# Altium PCB Nguon_MIC_PCB.PcbDoc
Units mil, origin at the board's own origin, x right, y up, seen from the top; angles counter-clockwise.
Board outline 3937.01 x 2362.2 mil, 2 copper layers (Top Layer, Bottom Layer); 26 components, 17 nets, 81 pads, 3 vias.
Unrouted connection lines stored in the file: 1.
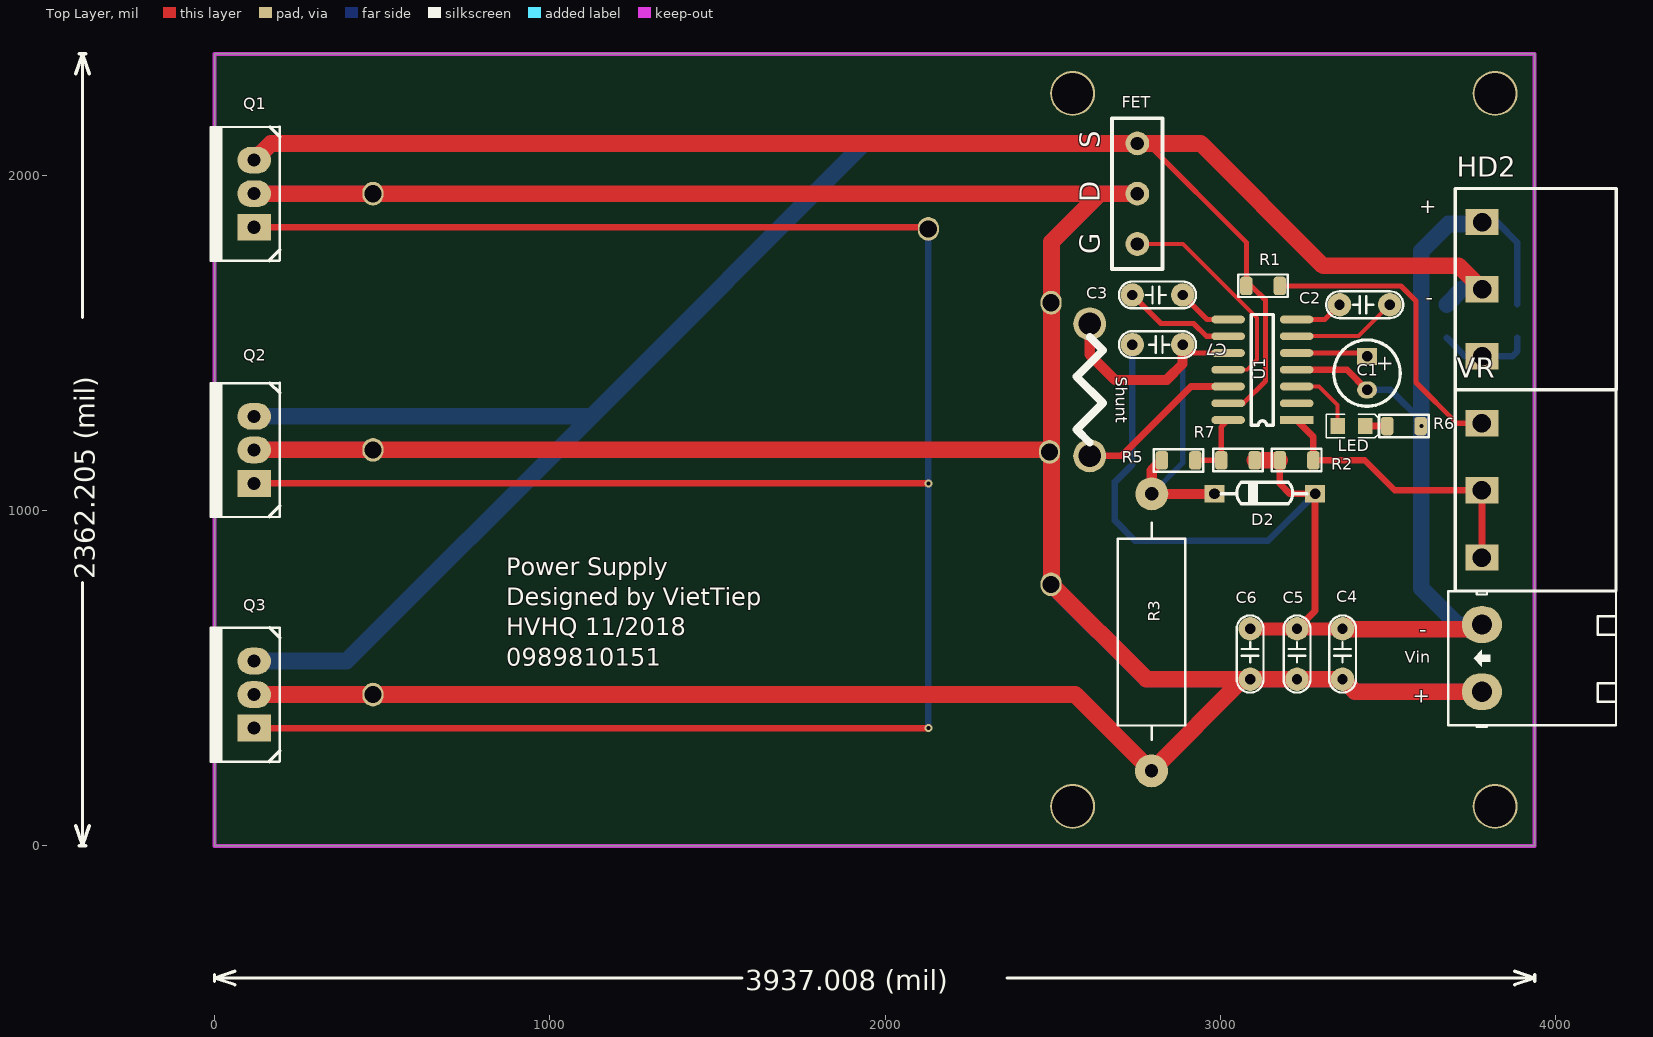
[diagram p0: Top Layer view]
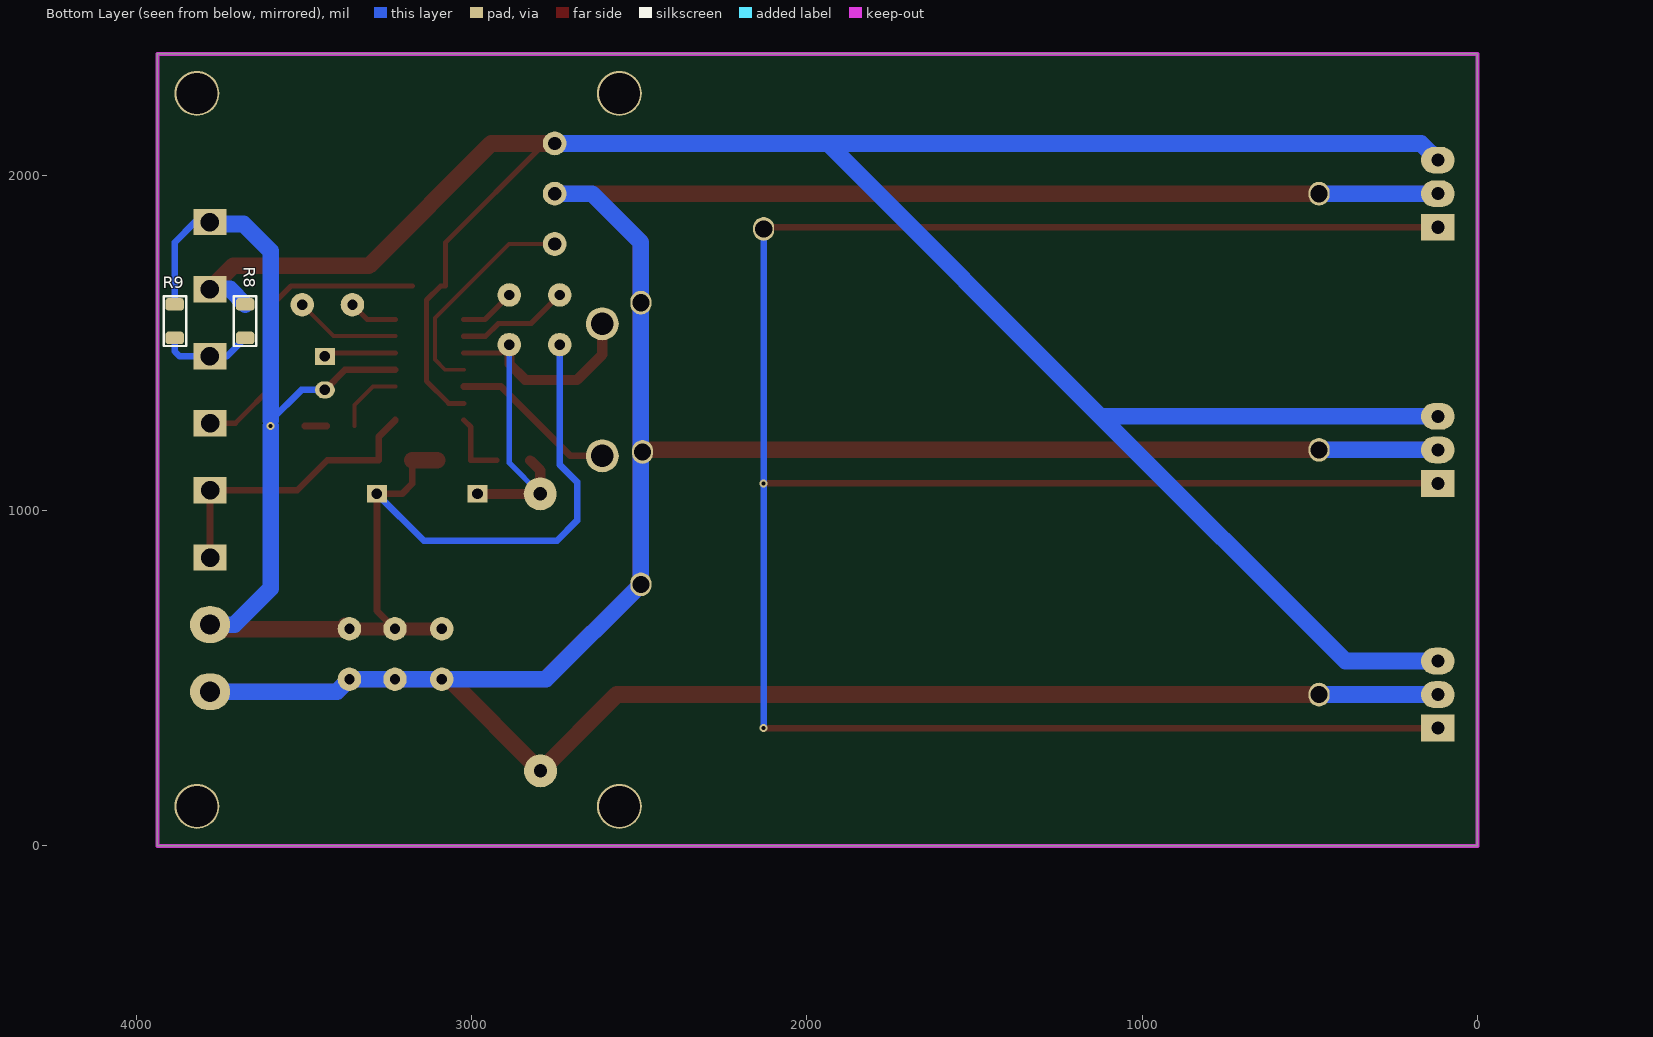
[diagram p1: Bottom Layer view, seen from below]

## Layer stack, top to bottom
Top Solder: solder mask 0.4, Solder Resist, Dk 3.5
Top Layer: signal copper 1.4
Dielectric 1: dielectric 12.6, FR-4, Dk 4.8
Bottom Layer: signal copper 1.4
Bottom Solder: solder mask 0.4, Solder Resist, Dk 3.5

## Board outline
0,0 3937.01,0 3937.01,2362.2 0,2362.2

## Design rules (kind name [scope] priority, off if disabled: settings)
Clearance [All] p1: gap=10 ignorepadtopadclearanceinfootprint=FALSE except(0: Arc-Hole Track-Hole SMDPad-Hole THPad-Hole Via-Hole Fill-Hole Poly-Hole Region-Hole Text-Hole)
PolygonConnect [All] p1: connectstyle=Relief reliefconductorwidth=10 reliefentries=4 polygonreliefangle="90 Angle" airgapwidth=10
RoutingVias [All] p1: holewidth=28 width=50 viastyle="Through Hole" minholewidth=28 minwidth=50 maxholewidth=28 maxwidth=50
SolderMaskExpansion [All] p1: expansion=4
Width [All] p1: maxlimit=118.11 minlimit=10 preferedwidth=10
30 further rules are at their usual default settings.

## Components (designator, comment, footprint, x,y, rotation, side; value= is the part's Value field where it differs from the comment)
C1 "Cap Pol1" C5mm 3437,1460 r270 top value=10u
C2 "Cap" CN1.5 3355,1614 r0 top value=104
C3 "Cap" CN1.5 2737,1643 r0 top value=104
C4 "Cap" CN1.5 3363.94,647.22 r270 top value=105
C5 "Cap" CN1.5 3228.16,647.22 r270 top value=105
C6 "Cap" CN1.5 3088.35,647.22 r270 top value=105
C7 "Cap" CN1.5 2887,1495 r180 top value=104
D2 "Z33V" 1N4148 3282,1050 r180 top
FET "Header 3" "Header 3 - 150mil" 2752,1945 r90 top
HD2 "Header 3" "BIG_Header 3" 3780,1860.5 r270 top
LED "LED SMD" LED_0805_Blue 3390.34,1252 r0 top
Q1 "IRF3205" TO-220 118.11,1845 r90 top
Q2 "IRF3205" TO-220 118.11,1081.1 r90 top
Q3 "IRF3205" TO-220 118.11,351.18 r90 top
R1 "#NAME?" SM-0805 3127,1670 r0 top
R2 "#NAME?" SM-0805 3227,1150 r0 top
R3 "#NAME?" R2W 2795,1050 r270 top
R5 "#NAME?" SM-0805 2875,1150 r180 top
R6 "#NAME?" SM-0805 3547,1252 r0 top
R7 "#NAME?" SM-0805 3052,1150 r0 top
R8 "#NAME?" SM-0805 3675,1565 r90 bottom
R9 "#NAME?" SM-0805 3885,1565 r270 bottom
Shunt "Shunt" "Shunt 5mR" 2610,1360 r270 top
U1 "MIC5158" SOIC14 3127,1420 r180 top
Vin "Header 2" HEAD2T 3779.53,459.85 r90 top
VR "Header 3" "BIG_Header 3" 3779.53,1260.5 r270 top

## Footprints (in the part's own frame and the unit in brackets; to place one, negate y for a bottom-side part, rotate by r counter-clockwise, add the part's x,y. Pads: shape width x height; smd on the part's side, far side on the other; paste and mask are expansions set on the pad)
1N4148 [mm]
  rect 1.5x1.3 hole 0.8: 1(0,0) 2(7.62,0)
  silkscreen extent 0.64,-0.89 7.11,0.76, body extent -1.5,-0.84 9.19,0.91, height 1.64
"BIG_Header 3" [mm]
  rect 2x2.5 hole 1.4: 1(0,0) 2(5.08,0) 3(10.173,0)
  silkscreen extent -2.54,-2.03 12.71,10.16, body extent -2.5,-1.75 12.67,10.25, height 3.15
C5mm [mm]
  rect 1.3x1.5 hole 0.8: 1(0,0)
  oval 1.3x1.5 hole 0.8: 2(2.54,0)
  silkscreen extent -1.24,-2.51 3.78,2.51, body extent -1.48,-2.46 3.51,2.54, height 11.01
CN1.5 [mil]
  round 70 hole 31: 1(0,0) 2(150,0)
  silkscreen extent -40,-40 190,40, body extent -40,-33 190,33, height 235
HEAD2T [mil] "Header 2, 2 pin, hight 300mil, Pin to Pin 200, Colour Green"
  oval 110x120 hole 60: 1(0,0) 2(200,0)
  silkscreen extent -105,-400 300,100, body extent -100,-406 294,66, height 334
"Header 3 - 150mil" [mm]
  round 1.8 hole 1: 1(-3.81,0) 2(0,0) 3(3.81,0)
  silkscreen extent -5.71,-1.91 5.71,1.91
LED_0805_Blue [mm] "Chip LED, 2-Leads, Body 2.0x1.3mm, IPC Medium Density"
  rect 1.1x1.2 smd: 1(-1.05,0) 2(1.05,0)
  silkscreen extent -1.91,-0.89 2.03,0.89, body extent -1,-0.63 1,0.62, height 0.68
R2W [mm] "R2W, 2 pin, 700mil"
  round 2.5 hole 1: 1(0,0) 2(20.98,-0.025)
  silkscreen extent 2.18,-2.57 18.62,2.54, body extent -0.69,-3.3 21.51,3.3, height 7.54
"Shunt 5mR" [mm]
  round 2.5 hole 1.7: 1(-5,0) 2(5,0)
  silkscreen extent -4,-1 4,1
SM-0805 [mm]
  rrect50% 0.95x1.4 smd mask+0.05: 1(-1.27,0) 2(1.27,0)
  silkscreen extent -1.88,-0.84 1.88,0.86, body extent -1,-0.62 1,0.63, height 0.6
SOIC14 [mm]
  rect 2.54x0.6 smd: 1(-2.54,3.81)
  oval 2.54x0.6 smd: 2(-2.54,2.54) 3(-2.54,1.27) 4(-2.54,0) 5(-2.54,-1.27) 6(-2.54,-2.54) 7(-2.54,-3.81) 8(2.642,-3.81) 9(2.642,-2.54) 10(2.642,-1.27) 11(2.642,0) 12(2.642,1.27) 13(2.642,2.54) 14(2.642,3.81)
  silkscreen extent -0.76,-4.19 0.89,4.19, body extent -3,-4.4 3,4.4, height 1.7
TO-220 [mil] "TO-220 - 1-2-3"
  rect 80x100 hole 39: 1(0,0)
  oval 80x100 hole 39: 2(100,0) 3(200,0)
  silkscreen extent -100,-76 300,130, body extent -119,-64 322,121, height 905

## Part data
C1: library part "Cap Pol", "Cap pol", LatestRevisionDate=17-Jul-2002, LatestRevisionNote="Re-released for DXP Platform.", PackageDescription="Polarized Capacitor (Radial); 2 Leads", PackageReference=RB7.6-15, Published=8-Jun-2000, Publisher="Altium Limited"
C2 C3 C4 C5 C6 C7: "Capacitor", LatestRevisionDate=17-Jul-2002, LatestRevisionNote="Re-released for DXP Platform.", PackageDescription="Radial Cap, Thru-Hole; 2 Leads; 0.3 in Pin Spacing", PackageReference=RAD-0.3, Published=8-Jun-2000, Publisher="Altium Limited"
D2: library part Diode, "Default Diode", Code_JEDEC=DO-214-AB, LatestRevisionDate=17-Jul-2002, LatestRevisionNote="Re-released for DXP Platform.", PackageDescription="DO-214-AB/SMC; 2 C-Bend Leads; Body 7.9 x 5.9 mm, inc. leads (LxW)", PackageReference=SMC, PackageVersion=Sep-1996, Published=8-Jun-2000, Publisher="Altium Limited"
HD2 VR: "Header, 3-Pin", LatestRevisionDate=17-Jul-2002, LatestRevisionNote="Re-released for DXP Platform.", Publisher="Altium Limited"
LED: "LED"
Q1 Q2 Q3: "HEXFET N-Channel Power MOSFET"
R1 R2 R5 R6 R7 R8 R9: library part "RES 0805", "RES SMD 10K OHM 5% 1/8W 0805", Manufacturer="Stackpole Electronics Inc.", Manufacturer Part Number=RMCF0805JT10K0, Operating Temperature="-55°C ~ 155°C", Package / Case="0805 (2012 Metric)", Power (Watts)="0.125W, 1/8W", Resistance (Ohms)=10k, Supplier Device Package=0805, Supplier Part Number 1=RMCF0805JT10K0TR-ND, Temperature Coefficient=±200ppm/°C, Tolerance=±5%, Category=Resistors, ComponentLink1Description=http://www.seielect.com/Catalog/SEI-RMCF_RMCP.pdf, ComponentLink1URL=http://www.seielect.com/Catalog/SEI-RMCF_RMCP.pdf, Composition="Thick Film", Features="Automotive AEC-Q200", Height="0.026\" (0.65mm)", Number of Terminations=2, Packaging="Tape & Reel (TR)", Pricing 1="5000=0.0019, 10000=0.00165, 25000=0.00145, 50000=0.00133, 125000=0.0013 (USD)", RoHS="RoHS Compliant", Size / Dimension="0.079\" L x 0.049\" W (2.00mm x 1.25mm)", Stock 1=965000, Supplier 1=Digi-Key
R3: library part "RES DIP", "RES DIP 10K OHM 5% 1/4W", Manufacturer="Stackpole Electronics Inc.", Manufacturer Part Number=RMCF0805JT10K0, Operating Temperature="-55°C ~ 155°C", Package / Case="0805 (2012 Metric)", Power (Watts)="0.125W, 1/8W", Resistance (Ohms)=56R, Supplier Device Package=0805, Temperature Coefficient=±200ppm/°C, Tolerance=±5%, Category=Resistors, ComponentLink1Description=http://www.seielect.com/Catalog/SEI-RMCF_RMCP.pdf, ComponentLink1URL=http://www.seielect.com/Catalog/SEI-RMCF_RMCP.pdf, Composition="Thick Film", Features="Automotive AEC-Q200", Height="0.026\" (0.65mm)", Number of Terminations=2, Packaging="Tape & Reel (TR)", RoHS="RoHS Compliant", Size / Dimension="0.079\" L x 0.049\" W (2.00mm x 1.25mm)"
U1: "Super LDO"
Vin: "Header, 2-Pin"

## Free pads (board coordinates)
  round 133.86 hole 122.05: 1(2559.06,2244.09) 2(3818.9,118.11) 3(3818.9,2244.09) 4(2559.06,118.11)
  oval 62.99x70.87 hole 51.18: 5(472.44,1945) 6(472.44,1181.1) 7(472.44,451.18) 8(2495,1620) 9(2490,1175) 10(2495,780) 11(2128.62,1840)

## Via types
v1: diameter 23.62, hole 11.81, Top Layer to Bottom Layer, 3 vias

## Nets (pads, with @x,y where several pads share a name; then routed paths per layer and width w, separated by ;. In a path a pad name is that pad's centre, name@x,y a point inside that pad or via, vN(x,y) a via of type N, cw(c..) or ccw(c..) an arc to the next point about the centre after c; other vN are vias at no path point)
Gate: FET.1 pad.11 Q1.1 Q2.1 Q3.1 U1.11 | length 8191
  Top Layer w11.81: FET.1 2888.72,1795 3109,1574.72 3109,1450 3079,1420 U1.11
  Top Layer w20: Q3.1 v1@2122.83,351.18 ; Q2.1 v1(2128.62,1081.1) ; Q1.1 pad.11@2128.62,1845
  Bottom Layer w20: v1(2128.62,351.18) v1(2128.62,1081.1) pad.11@2128.62,1845
GND: C1.2 C4.1 C5.1 C6.1 C7.2 D2.1 HD2.1 R2.1 R6.2 R7.2 R9.1 U1.4 Vin.2 | length 4817.7
  Top Layer w20: R2.1 3177,1080 3207,1050 D2.1 3282,701.06 C5.1 ; U1.4 3377,1420 C1.2
  Top Layer w39.37: C6.1 C5.1 C4.1 C4.1@3378.57,661.85
  Top Layer w50: R7.2 R2.1 ; C4.1@3367.5,646.07 3765.75,646.07 Vin.2
  Bottom Layer w20: C7.2 2737,1137 2685,1085 2685,970 2745,910 3142,910 D2.1 ; C1.2 3507,1360 3599,1268 v1(3599,1252) ; HD2.1 3824.5,1860.5 3885,1800 R9.1
  Bottom Layer w50: v1(3599,1252) 3599,768 3707.15,659.85 Vin.2 ; 3599,1268 3599,1774 3679.57,1854.57 HD2.1@3774.07,1854.57
NetC1_1: C1.1 U1.5 | length 214.1
  Top Layer w15.75: U1.5 3427,1470 C1.1
NetC2_1: C2.1 U1.7 | length 146.2
  Top Layer w15.75: U1.7 3311,1570 C2.1
NetC2_2: C2.2 U1.6 | length 316.9
  Top Layer w11.81: U1.6 3411,1520 C2.2
NetC3_1: C3.1 U1.9 | length 336.9
  Top Layer w15.75: C3.1 2822,1558 2920,1558 2958,1520 U1.9
NetC3_2: C3.2 U1.8 | length 166.2
  Top Layer w15.75: C3.2 2960,1570 U1.8
NetC7_1: C7.1 D2.2 R3.1 R5.2 Shunt.1 U1.10 | length 1406.3
  Top Layer w15.75: C7.1 2912,1470 U1.10
  Top Layer w30: Shunt.1 2610,1465 2685,1390 2840,1390 2887,1437 C7.1 ; R5.2 2795,1120 R3.1 D2.2
  Bottom Layer w15.75: R3.1 2887,1142 C7.1
NetHD2_3: HD2.3 R8.1 R9.2 | length 279
  Bottom Layer w20: R8.1 3730,1460 HD2.3 3870,1460 3885,1475 R9.2
NetLED_1: LED.1 U1.3 | length 207.8
  Top Layer w11.81: U1.3 3294,1370 3349,1315 LED.1
NetLED_2: LED.2 R6.1 | length 65.3
  Top Layer w20: LED.2 R6.1
NetR1_2: R1.2 VR.1 | length 914.5
  Top Layer w15.75: R1.2 3538,1670 3583,1625 3583,1382 3704.5,1260.5 VR.1
NetR2_2: R2.2 U1.1 VR.2 VR.3 | length 880.8
  Top Layer w20: U1.1 3277,1220 R2.2 3430,1150 3519.5,1060.5 VR.2 VR.3
NetR5_1: R5.1 R7.1 U1.14 | length 205.7
  Top Layer w15.75: R5.1 R7.1 3002,1249 U1.14
NetShunt_2: Shunt.2 U1.12 | length 498.7
  Top Layer w20: Shunt.2 2705,1163.15 2911.85,1370 U1.12
Source: FET.3 HD2.2 Q1.3 Q2.3 Q3.3 R1.1 R8.2 U1.13 | length 11107.3
  Top Layer w15: FET.3@2782,2095 3077,1800 R1.1 3092,1670 3134,1628 3134,1386 3068,1320 U1.13
  Top Layer w50: Q1.3 168.11,2095 FET.3 2782,2095 2941.3,2095 3306.3,1730 3710.5,1730 HD2.2
  Bottom Layer w50: Q3.3 393.7,551.18 1123.62,1281.1 ; Q2.3 1123.62,1281.1 ; Q1.3 168.11,2095 1937.52,2095 ; FET.3 1937.52,2095 ; R8.2 3720.5,1660.5 HD2.2 ; 1123.62,1281.1 1937.52,2095
VCC: C4.2 C5.2 C6.2 FET.2 pad.5 pad.6 pad.7 pad.8 pad.9 pad.10 Q1.2 Q2.2 Q3.2 R3.2 Vin.1 | length 14624.6
  Top Layer w50: Q3.2 pad.7 2566.82,451.18 R3.2 C6.2@3067.22,497.22 ; Q2.2 pad.6 pad.9@2496,1181.1 ; Q1.2 pad.5 2640,1945 ; FET.2 2640,1945 ; 3399.31,461.85 C4.2 C5.2 C6.2 C6.2@3067.22,497.22 ; 3400,459.85 Vin.1 ; pad.9@2496,1181.1 2496,780 2778.78,497.22 C6.2@3067.22,497.22 ; pad.9@2496,1181.1 2496,1801 2640,1945
  Bottom Layer w50: Q3.2 pad.7 ; Q2.2 pad.6 ; Q1.2 pad.5 ; FET.2 2640,1945 2495,1800 pad.8 pad.10 2777.78,497.22 C6.2 C5.2 C4.2 3401.31,459.85 Vin.1
pads on no net: U1.2

## Keep-outs
Keep-Out Layer:
  the board outline again, w11.81

## Silkscreen, mask and mechanical layers (free items; w line width, h text height)
Top Overlay:
  lines w10: -413.7,60 -393.7,0 ; -413.7,2302.2 -393.7,2362.2 ; -403.7,0 -383.7,0 ; -403.7,2362.2 -383.7,2362.2 ; -393.7,785.23 -393.7,0 ; -393.7,1576.98 -393.7,2362.2 ; -373.7,60 -393.7,0 ; -373.7,2302.2 -393.7,2362.2 ; 0,-403.7 0,-383.7 ; 60,-413.7 0,-393.7 ; 60,-373.7 0,-393.7 ; 1572.63,-393.7 0,-393.7 ; 2364.38,-393.7 3937.01,-393.7 ; 3877.01,-413.7 3937.01,-393.7 ; 3877.01,-373.7 3937.01,-393.7 ; 3937.01,-403.7 3937.01,-383.7
  text "S" at 2640,2080 h60 r90
  text "+" at 3645,1940 h78.74 r180
  text "D" at 2640,1920 h60 r90
  text "G" at 2640,1765 h60 r90
  text "-" at 3635,1665 h78.74 r180
  text "2362.205 (mil)" at -357.71,795.23 h60 r90
  text "-" at 3615,675 h78.74 r180
  text "Power Supply / Designed by VietTiep / HVHQ 11/2018 / 0989810151" at 870,520 h90
  text "+" at 3625,480 h78.74 r180
  text "3937.008 (mil)" at 1582.63,-429.69 h60
Bottom Solder:
  lines w40: 118.11,451.18 472.44,451.18 ; 118.11,551.18 396.18,551.18 1940,2095 ; 118.11,1181.1 472.44,1181.1 ; 118.11,1281.1 1126.1,1281.1 ; 118.11,1945 472.44,1945 ; 118.11,2045 120,2045 170,2095 2752,2095 2941.3,2095 ; 2752,1945 2640,1945 2495,1800 2495,780 2780,495 2790,495 ; 2785,497.22 3363.94,497.22 3401.31,459.85 3779.53,459.85 ; 3779.53,659.85 3710.15,659.85 3600,770 3600,1530 3599,1770 3680,1855 3755,1855 3780,1860.5

## Text inside footprints (layer, text, board x,y; h text height)
C1: Top Overlay "+" at 3470,1465 h47.24 r270